# Allegro board hvps.brd
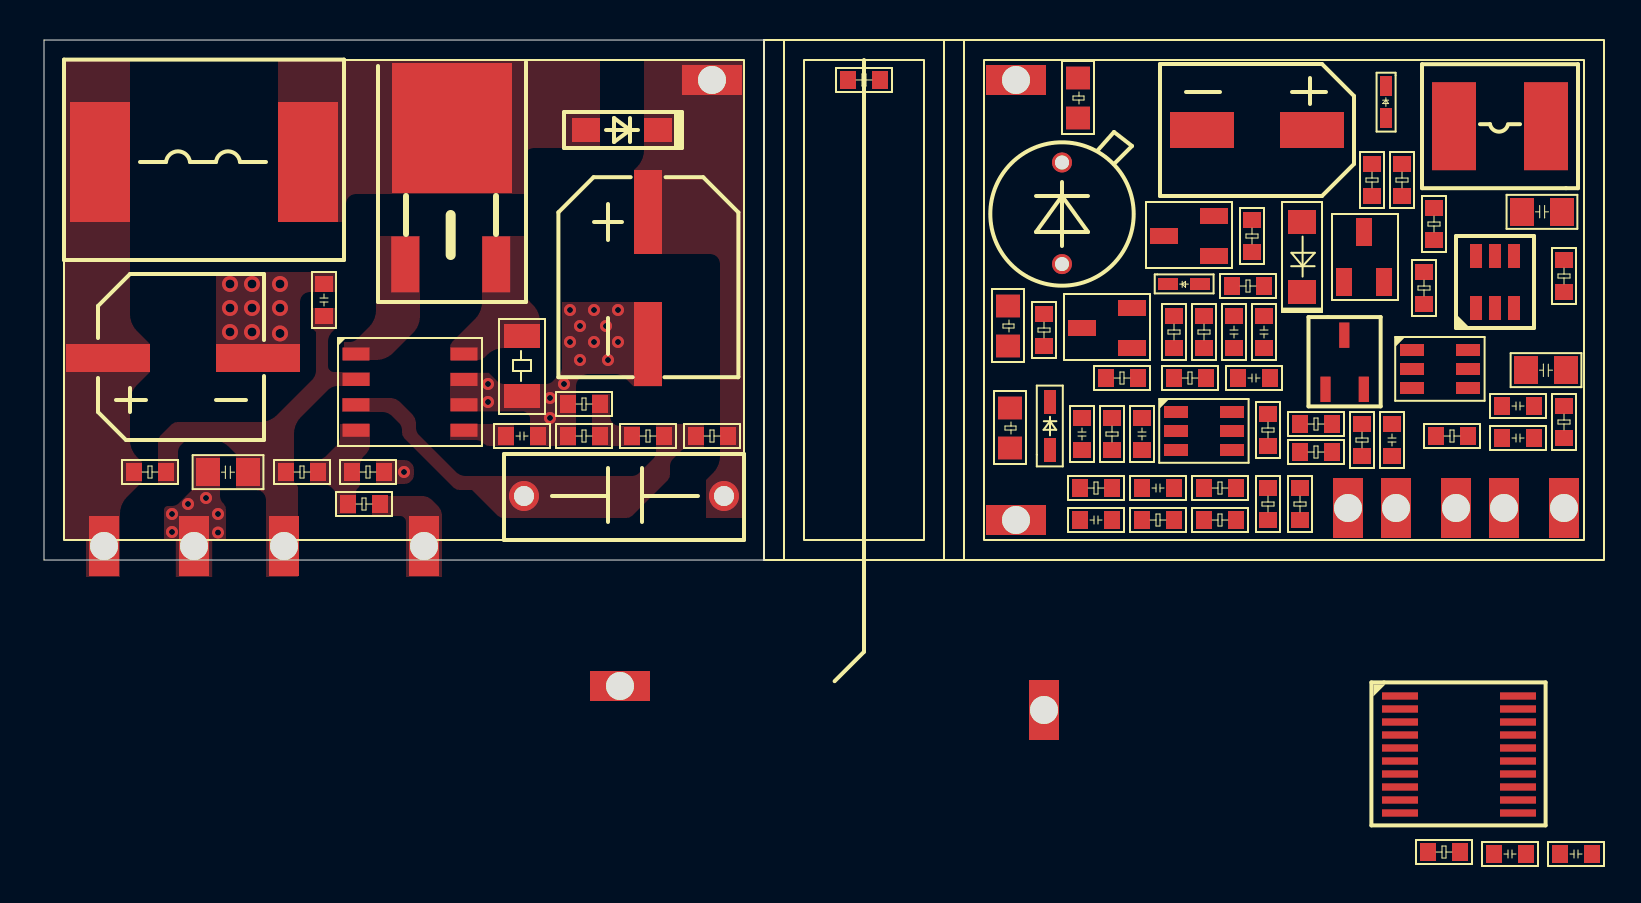
[diagram p0: board, top side]
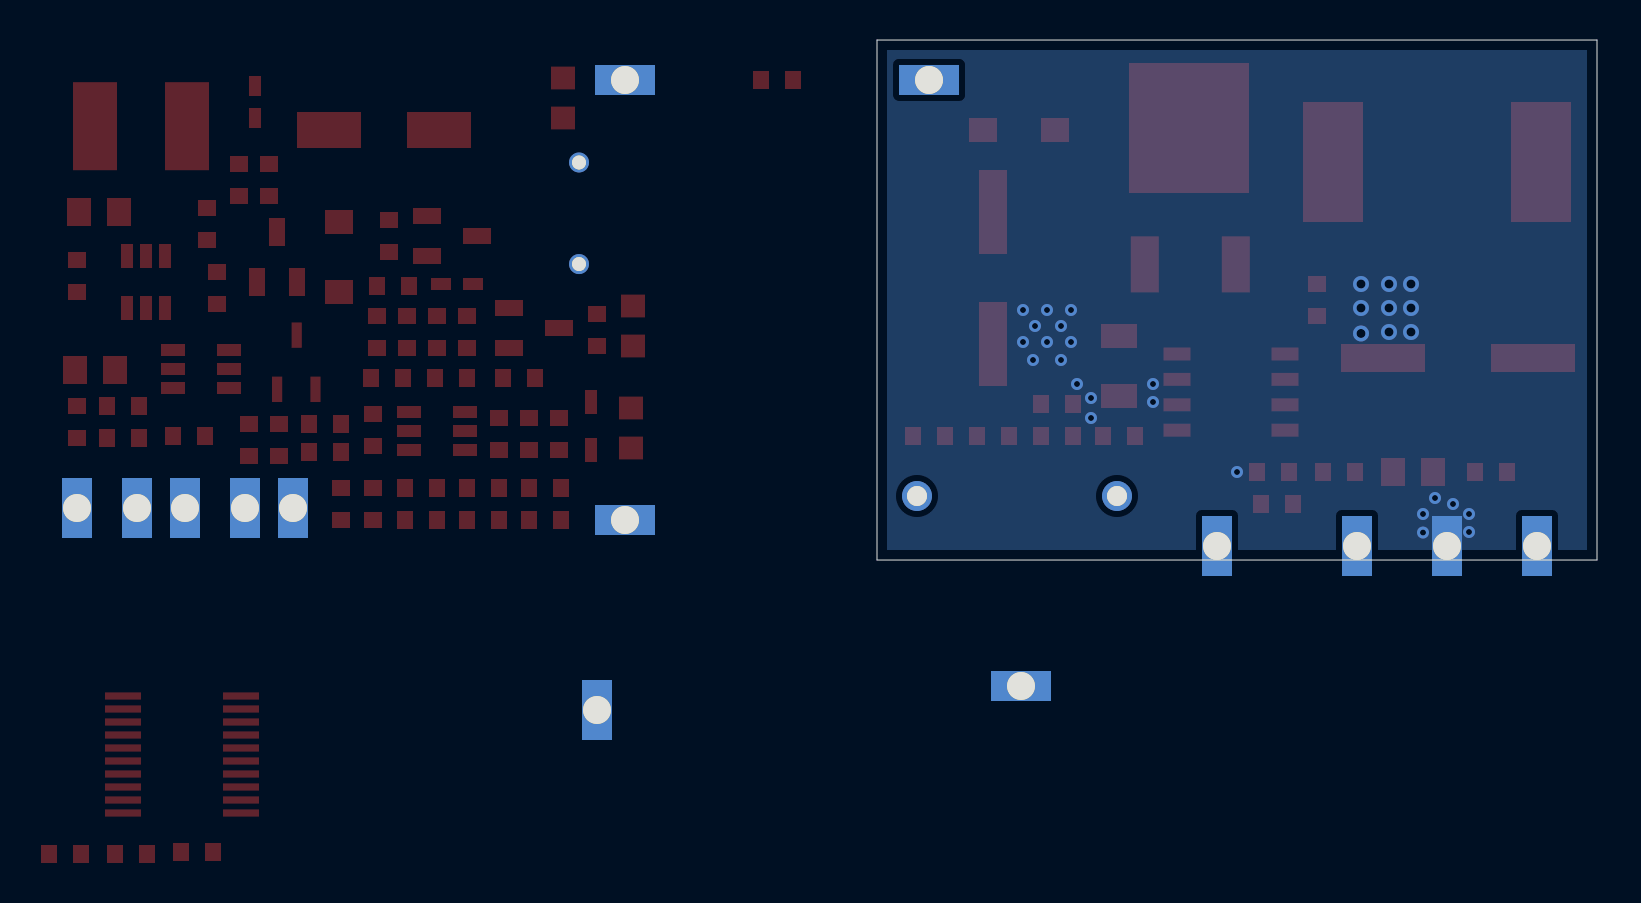
[diagram p1: board, bottom side, seen from below]

Outline 36 x 26 mm; copper layers: TOP, BOTTOM. Coordinates in mm from the lower left corner of the outline.
Outline path: 0,26 0,0 36,0 36,26 0,26

## Design rules (mm)
constraint set DEFAULT: min track width 0.254

## Placement (name value [footprint] x y rotation side)
C1  4.7uF/400V  [CAP-SMD-D8D0-L10D3-B8D3]  30.2 17.4 270 top
C2  0.1uF/35V  [C0603]  14 12.2 90 top
C3  220uF/35V  [CAP-SMD-D8D0-L8D3-W8D3-P7D5]  3.2 10.1 0 top
C4  10uF/35V  [C0805]  10.2 4.4 180 top
C5  0.1uF/35V  [C0603]  23.1 6.2 0 top
C6  0.1uF/400V  [CAP-THR-L11D4-W3D8-P10D0-D0D8]  34 3.2 180 top
C15  100uF/35V  [CAP-SMD-L6D6-W6D6-P5D5-MM]  63.4 21.5 180 top
C30  0.1uF/16V  [C0603]  51.9 5.5 90 top
C34  10uF/16V  [C0603]  72.9 6.1 0 top
C35  0.1uF/16V  [C0603]  72.9 7.7 0 top
C36  0.1uF/16V  [C0603]  67.4 5.2 90 top
C37  10uF/35V  [C0805]  76.1 9.5 180 top
C38  10uF/35V  [C0805]  73.9 17.4 0 top
C39  0.1uF/16V  [C0603]  75.8 -14.7 0 top
C40  0.1uF/16V  [C0603]  72.5 -14.7 0 top
C41  10uF/16V  [C0603]  61 10.6 90 top
C42  0.1uF/16V  [C0603]  59.5 10.6 90 top
C43  0.1uF/16V  [C0603]  54.9 7.1 270 top
C44  0.1uF/16V  [C0603]  54.9 3.6 0 top
C45  0.1uF/16V  [C0603]  51.8 2 0 top
C46  0.1uF/16V  [C0603]  59.7 9.1 0 top
D1  E1G  [SOD-123FL]  30.7 21.5 180 top
D2  PTVSLC3D3V3B  [SOD323-L1D8-W1D3-P2D4-MM]  50.3 5.5 90 top
D4  SAPD  [SAPD-THR-2P]  50.9 17.3 90 top
D7  BAS521-7  [SOD-523-L1D2-W0D8-P1D6-MM]  67.1 23.7 270 top
D11  MMSZ12T1G  [SOD-123-L2D8-W1D8-P3D5-MM]  62.9 13.4 90 top
D12  BAS521-7  [SOD-523-L1D2-W0D8-P1D6-MM]  56.2 13.8 0 top
L1  100uH/2A  [IND-SMD-L11D5-W10D0-P10D4]  2.8 19.9 0 top
L4  47uH/1A  [IND-SMD-L5D0-W5D0-P4D6-MM]  75.1 21.69 180 top
NOREF  -  []  28.8 -6.3 90 top
NOREF#2  -  []  0 13 0 top
NOREF#3  -  []  28.5 15.7 0 top
NOREF#4  -  []  3 0.7 0 top
NOREF#5  -  []  23.9 7.3 90 top
NOREF#6  -  []  30.2 10.8 90 top
NOREF#7  -  []  3.2 10.1 0 top
NOREF#8  -  []  18 0 90 top
NOREF#9  -  []  28.8 -6.3 90 top
NOREF#10  -  []  23.9 8.2 90 top
NOREF#11  -  []  2.7 8.25 0 top
NOREF#12  -  []  7.5 0.7 0 top
NOREF#13  -  []  12 0.7 0 top
NOREF#14  -  []  18.06 14.78 0 top
NOREF#15  -  []  18.06 14.78 0 top
NOREF#16  -  []  25.05 9.57 90 top
NOREF#17  -  []  33.6 12.9 90 top
NOREF#18  -  []  8.3 6 90 top
NOREF#19  -  []  27.1 21.5 0 top
Q1  AOD458  [TO-252-2-DPAK]  20.4 21.6 90 top
Q3  FH3400C  [SOT-23-3-L2D9-W1D3-P1D9-MM]  54.4 12.6 0 top
Q5  FH3400C  [SOT-23-3-L2D9-W1D3-P1D9-MM]  67 13.9 270 top
Q9  AO3401A  [SOT-23-3-L2D9-W1D3-P1D9-MM]  58.5 17.2 0 top
R1  50mR  [R1206]  23.9 11.2 270 top
R2  DNP  [R0603]  27.8 7.8 180 top
R3  10K  [R0603]  27.8 6.2 180 top
R4  0  [R0603]  31 6.2 180 top
R5  1.5M  [R0603]  34.2 6.2 180 top
R6  DNP  [R0603]  12.1 4.4 0 top
R7  0  [R0603]  17 4.4 180 top
R8  DNP  [R0603]  4.5 4.4 0 top
R9  DNP  [R0603]  16.8 2.8 180 top
R10  682  [R0603]  64.4 5.4 180 top
R11  332K  [R0805]  48.2 10.7 90 top
R12  0  [R0603]  50 10.7 90 top
R16  10K  [R0603]  69.6 6.2 0 top
R18  1M  [R0603]  61 13.7 180 top
R22  1K  [R0603]  60.4 17 270 top
R26  1K  [R0603]  69.5 16 90 top
R28  100  [R0603]  69 12.8 90 top
R33  182K  [R0603]  66.4 19.8 270 top
R35  10K  [R0603]  67.9 18.2 90 top
R36  0  [R0603]  76 6.1 90 top
R40  10K  [R0603]  76 13.4 90 top
R41  100K  [R0805]  48.3 5.6 90 top
R42  100  [R0603]  58 12.2 270 top
R43  1K  [R0603]  56.5 10.6 90 top
R56  100K  [R0603]  53.4 5.5 90 top
R57  4.99K  [R0603]  62.8 6.8 0 top
R60  499  [R0603]  61.2 2 90 top
R61  0  [R0603]  56.5 9.1 0 top
R62  10K  [R0603]  65.9 5.2 90 top
R63  1K  [R0603]  62.8 2 90 top
R64  0  [R0603]  69.2 -14.6 0 top
R65  4.99K  [R0603]  58 2 0 top
R66  4.99K  [R0603]  56.5 2 180 top
R67  100K  [R0603]  51.8 3.6 0 top
R68  4.99K  [R0603]  61.2 7.3 270 top
R69  100K  [R0603]  58 3.6 0 top
R70  100K  [R0603]  53.1 9.1 0 top
R71  0  [R0805]  51.7 22.1 90 top
R72  0  [R0603]  40.2 24 0 top
TP1  T POINT F  [STAMP_HOLE_1D5X3D0_1D4]  28.8 -6.3 270 top
TP2  T POINT F  [STAMP_HOLE_1D5X3D0_1D4]  33.4 24 270 top
TP3  T POINT F  [STAMP_HOLE_1D5X3D0_1D4]  3 0.7 180 top
TP4  T POINT F  [STAMP_HOLE_1D5X3D0_1D4]  7.5 0.7 180 top
TP5  T POINT F  [STAMP_HOLE_1D5X3D0_1D4]  12 0.7 180 top
TP6  T POINT F  [STAMP_HOLE_1D5X3D0_1D4]  19 0.7 180 top
TP16  QUENCH  [STAMP_HOLE_1D5X3D0_1D4]  70.6 2.6 180 top
TP25  RESET  [STAMP_HOLE_1D5X3D0_1D4]  65.2 2.6 180 top
TP32  T POINT F  [STAMP_HOLE_1D5X3D0_1D4]  73 2.6 180 top
TP33  T POINT F  [STAMP_HOLE_1D5X3D0_1D4]  76 2.6 180 top
TP34  T POINT F  [STAMP_HOLE_1D5X3D0_1D4]  50 -7.5 0 top
TP36  T POINT F  [STAMP_HOLE_1D5X3D0_1D4]  48.6 24 90 top
TP37  T POINT F  [STAMP_HOLE_1D5X3D0_1D4]  48.6 2 90 top
TP38  PULSE  [STAMP_HOLE_1D5X3D0_1D4]  67.6 2.6 180 top
U1  MAX1771ESA+  [SO-8]  21 10.3 270 top
U2  TLV3501AIDBVR  [SOT-23-6-L2D9-W1D6-PD0D95-CD2D8-MM]  68.4 10.5 0 top
U5  MAX5026EUT-T  [SOT23-6]  72.5 13.9 0 top
U8  TL431  [SOT-23-3-TL431]  63.6 8.1 0 top
U9  TXS0108EPW  [TSSOP-20-L6D5-W4D4-PD0D65-CD6D5-MM]  67.8 -6.8 0 top
U10  OPA357AIDBVR  [SOT-23-6-L2D9-W1D6-PD0D95-CD2D8-MM]  56.6 7.4 0 top

## Library data of the parts
C1 C3 C6 C15 = C
C2 C4 C5 C30 C34-C46 = CAP NP
D1 D4 D7 D12 = DIODE
D2 = DIODE SCHOTTKY
D11 = DIODE ZENER
L1 L4 = INDUCTOR
Q1 = IRF644PbF
Q3 Q5 = FH3400C
Q9 = BSP316P_0
R1-R12 R16 R18 R22 R26 R28 R33 R35 R36 R40-R43 R56 R57 R60-R72 = R
TP1-TP6 TP16 TP25 TP32-TP34 TP36-TP38 = T POINT F
U1 = MAX1771ESA+
U2 = TLV3501AIDBVR
U5 = MAX5026EUT-T
U8 = TL431/TI
U9 = TXS0108EPW
U10 = OPA357AIDBVR

## Footprints (pads in the part's own frame, mm; a bottom-side part is the same pattern mirrored in y, then rotated)
C0603
  rect 0.8x0.9 smd: 1(0,0) 2(1.6,0)
C0805
  rect 1.2x1.4 smd: 1(0,0) 2(2,0)
CAP-SMD-D8D0-L8D3-W8D3-P7D5
  rect 4.2x1.4 smd: 1(0,0) 2(7.5,0)
CAP-SMD-D8D0-L10D3-B8D3
  rect 4.2x1.4 smd: 1(0,0) 2(6.6,0)
CAP-SMD-L6D6-W6D6-P5D5-MM
  rect 3.2x1.8 smd: 1(0,0) 2(5.5,0)
CAP-THR-L11D4-W3D8-P10D0-D0D8
  round 1.5 hole 1: 1(0,0) 2(10,0)
IND-SMD-L5D0-W5D0-P4D6-MM
  rect 2.2x4.4 smd: 1(0,0) 2(4.6,0)
IND-SMD-L11D5-W10D0-P10D4
  rect 3x6 smd: 1(0,0) 2(10.4,0)
R0603
  rect 0.8x0.9 smd: 1(0,0) 2(1.6,0)
R0805
  rect 1.14x1.2 smd: 1(0,0) 2(2,0)
R1206
  rect 1.2x1.8 smd: 1(0,0) 2(3,0)
SAPD-THR-2P
  round 1 hole 0.7: 1(2.576,0) 2(-2.504,0)
SO-8
  rect 0.65x1.35 smd: 1(0,-5.4) 2(1.27,-5.4) 3(2.54,-5.4) 4(3.81,-5.4) 5(3.81,0) 6(2.54,0) 7(1.27,0) 8(0,0)
SOD323-L1D8-W1D3-P2D4-MM
  rect 1.2x0.6 smd: 1(0,0) 2(2.4,0)
SOD-123-L2D8-W1D8-P3D5-MM
  rect 1.2x1.4 smd: 1(0,0) 2(3.5,0)
SOD-123FL
  rect 1.4x1.2 smd: 1(0,0) 2(3.6,0)
SOD-523-L1D2-W0D8-P1D6-MM
  rect 1x0.6 smd: 1(0,0) 2(1.6,0)
SOT23-6
  rect 0.6x1.2 smd: 1(-0.9,-1.3) 2(0.05,-1.3) 3(1,-1.3) 4(1,1.3) 5(0.05,1.3) 6(-0.9,1.3)
SOT-23-3-L2D9-W1D3-P1D9-MM
  rect 1.4x0.8 smd: 1(0,-2) 2(0,0) 3(-2.5,-1)
SOT-23-3-TL431
  rect 0.51x1.27 smd: 1(0.476,0.434) 2(1.415,3.142) 3(2.391,0.434)
SOT-23-6-L2D9-W1D6-PD0D95-CD2D8-MM
  rect 1.2x0.6 smd: 1(0,0) 2(0,-0.95) 3(0,-1.9) 4(2.8,-1.9) 5(2.8,-0.95) 6(2.8,0)
STAMP_HOLE_1D5X3D0_1D4
  rect 1.5x3 hole 1.4: 1(0,0)
TO-252-2-DPAK
  rect 2.8x1.4 smd: 1(-6.82,2.34) 3(-6.82,-2.21)
  rect 6.5x6 smd: 2(0,0)
TSSOP-20-L6D5-W4D4-PD0D65-CD6D5-MM
  rect 1.8x0.36 smd: 1(0,0) 2(0,-0.65) 3(0,-1.3) 4(0,-1.95) 5(0,-2.6) 6(0,-3.25) 7(0,-3.9) 8(0,-4.55) 9(0,-5.2) 10(0,-5.85) 11(5.9,-5.85) 12(5.9,-5.2) 13(5.9,-4.55) 14(5.9,-3.9) 15(5.9,-3.25) 16(5.9,-2.6) 17(5.9,-1.95) 18(5.9,-1.3) 19(5.9,-0.65) 20(5.9,0)

## Nets
GND: C1.2 C2.2 C3.2 C4.2 C5.2 C39.1 C40.2 R1.2 R2.2 R3.2 R7.1 TP1.1(TP) TP4.1(TP) U1.6 U1.7 U9.11
GND_FIELD SIGNAL: C34.2 C35.2 C36.2 C41.2 C42.2 C44.2 C45.2 D2.1 Q3.2(S) Q5.2(S) R10.2 R16.2 R18.1 R26.2 R41.1 R43.2 R56.2 R66.1 R70.1 TP37.1(TP) U2.2(V-) U2.6 U8.2 U10.2(V-)
GND_QUENCH: C15.2 C37.2 C38.2 R35.2 TP34.1(TP) U5.1 U5.2
VDD5: C40.1 U9.19(VCCB)
VDD5X: C34.1 C35.1 C41.1 C42.1 R60.1 R65.2 U2.4 U10.5 U10.6
VDD33: C39.2 R64.1 U9.2
AUX_PWR_EN: R36.1 TP33.1(TP)
AUX_PWR_IN: C37.1 C38.1 L4.1 R40.1 TP32.1(TP) U5.5(VCC)
EN: R9.1 TP6.1(TP)
HV+: C1.1 C6.1 D1.1(K) R5.1 TP2.1(TP)
HVPS: R71.2 TP36.1(TP)
PHOTON_PULSE: U9.9
PULSE: R16.1 R62.1 TP38.1(TP) U2.5 U9.12
PWR_IC: C2.1 C4.1 R6.1 R8.2 TP5.1(TP) U1.2(V+)
PWR_IN: C3.1 L1.1 R8.1 TP3.1(TP)
QUENCH_VDWN: U9.1
QUENCH_VOLTAGE_DOWN: R28.1 TP16.1(TP) U9.20
RESET_DIS: U9.3
RESET_DISCHARGE: R42.1 TP25.1(TP) U9.18
VQUENCH: C15.1 D7.1(K) Q9.2(S) R22.1 R33.1
VREF: C36.1 R10.1 R57.2 R63.2
N00177: Q1.1 U1.1
N00181: Q1.3(S) R1.1 U1.8
N00224: D1.2 L1.2 Q1.2
N00671: C5.1 U1.5
N03183: R6.2 R7.2 R9.2 U1.4
N281531: C6.2 R4.1 R5.2 U1.3
N361468: R2.1 R3.1 R4.2
N365393: D7.2 L4.2 U5.6
N365573: R36.2 R40.2 U5.4
N365581: R33.2 R35.1 U5.3
N370992: D11.1(CATHODE) Q9.1 R22.2
N371048: D11.2 Q5.3
N371052: D4.2 D12.1(K) R11.2 R12.2
N371122: D12.2 Q9.3 R18.2
N371190: Q5.1 R26.1 R28.2
N371268: C30.2 D2.2(CATHODE) R11.1 R41.2
N371272: Q3.3 R12.1
N371414: Q3.1 R42.2 R43.1
N371666: C30.1 C43.2 R56.1
N372066: R57.1 R60.2 U8.1(REF) U8.3
N375383: R61.1 U2.1
N376175: R62.2 R63.1 U2.3
N378300: R64.2 U9.10
N379806: C44.1 R65.1 R66.2 R67.2
N380805: C43.1 R67.1 U10.3
N381019: R68.2 R69.2 U10.4
N381074: C46.2 R68.1 U10.1
N381200: C45.1 R69.1
N382559: C46.1 R61.2 R70.2
N382943: D4.1(K) R71.1

Pads without a net: R72 1 2; U9 4 5 6 7 8 13 14 15 16 17

## Via types
v1: diameter 0.6, hole 0.3, TOP to BOTTOM, 22 vias
v2: diameter 0.8, hole 0.45, TOP to BOTTOM, 9 vias

## Routing (per net, layer and track width the routed paths; a pad name or vN(x,y) marks a point on that pad's centre or on a via; arc(x,y) is an arc through that point)
GND:
  vias: v1(6.4,2.3) v1(6.4,1.4) v1(7.2,2.8) v1(8.1,3.1) v1(8.7,2.3) v1(8.7,1.37) v1(18,4.4) v1(22.2,8.8) v1(22.2,7.9) v1(25.3,8.1) v1(25.3,7.1) v1(26,8.8) v1(26.3,12.5) v1(26.3,10.9) v1(26.8,11.7) v1(26.8,10) v1(27.5,12.5) v1(27.5,10.9) v1(28.1,11.7) v1(28.2,10) v1(28.7,12.5) v1(28.7,10.9) v2(9.3,13.8) v2(9.3,12.6) v2(9.3,11.4) v2(10.4,13.8) v2(10.4,12.6) v2(10.4,11.4) v2(11.8,13.8) v2(11.8,12.6) v2(11.8,11.33)

## Copper pours and planes (outline as drawn; the poured copper is in the pictures)
GND on TOP: 25.9,12.9 30.9,12.9 30.9,8.68 29.48,8.68 29.07,9.09 28.83,9.24 28.56,9.3 27.2,9.3 27.02,9.26 26.86,9.16 26.74,9.04 26.64,8.88 26.6,8.7 26.6,5.7 24.3,5.7 24.3,7.08 24.28,7.17 24.23,7.25 24.11,7.36 24.03,7.42 23.94,7.43 20.3,7.43 20.3,9.36 22.25,9.36 22.66,8.94 22.82,8.84 23,8.8 25.1,8.8 25.28,8.84 25.44,8.94 25.76,9.26 25.86,9.42 25.9,9.6
GND on TOP: 8.6,14.4 14.6,14.4 14.6,13.4 13.3,13.4 12.95,13.25 12.8,12.9 12.8,9.4 8.6,9.4
GND on TOP: 7.5,5.2 8.8,5.2 8.8,3.2 8.84,3.02 8.94,2.86 8.96,2.84 9.06,2.68 9.1,2.5 9.1,1 8.41,1 8.41,-0.85 6.59,-0.85 6.59,1 6,1 6,2.5 6.06,2.64 6.2,2.7 6.4,2.7 6.58,2.74 6.74,2.84 7.36,3.46 7.46,3.62 7.5,3.8
GND on BOTTOM: 35.5,0.5 35.5,25.5 0.5,25.5 0.5,0.5
EN on TOP: 16.4,3.2 18.9,3.2 19.18,3.14 19.41,2.99 19.69,2.71 19.84,2.48 19.9,2.2 19.9,-0.85 18.1,-0.85 18.1,1.9 18.01,2.11 17.8,2.2 16.4,2.2
HV+ on TOP: 30,25 35,25 35,2.1 33.1,2.1 33.1,4 33.45,4.35 33.71,4.74 33.8,5.2 33.8,14.8 33.65,15.15 33.3,15.3 29.5,15.3 29.5,19.5 29.65,19.65 29.91,20.04 30,20.5
PWR_IC on TOP: 13.4,12.6 14.6,12.6 14.6,11.6 14.41,11.41 14.26,11.18 14.2,10.9 14.2,9.7 14.29,9.49 14.5,9.4 16.3,9.4 16.3,8.7 14.7,8.7 14.42,8.64 14.19,8.49 12.85,7.15 12.59,6.76 12.5,6.3 12.5,3.9 12.63,3.77 12.68,3.69 12.7,3.6 12.7,-0.85 11.1,-0.85 11.1,3 10.95,3.35 10.6,3.5 9.6,3.5 9.6,5.3 9.25,5.65 8.86,5.91 8.4,6 7.3,6 7.12,5.96 6.96,5.86 6.84,5.74 6.74,5.58 6.7,5.4 6.7,3.8 5.7,3.8 5.7,5.9 5.74,6.08 5.84,6.24 6.36,6.76 6.52,6.86 6.7,6.9 10.8,6.9 11.26,6.99 11.65,7.25 13.39,8.99 13.54,9.22 13.6,9.5 13.6,11.4 13.4,11.6
PWR_IN on TOP: 1,25 4.3,25 4.3,12.3 4.39,11.84 4.65,11.45 5.3,10.8 5.3,9.4 4.65,8.75 4.39,8.36 4.3,7.9 4.3,6 4.39,5.54 4.65,5.15 4.9,4.9 4.9,3.9 4.15,3.15 3.89,2.76 3.8,2.3 3.8,-0.85 2.1,-0.85 2.1,1 1,1
N00177 on TOP: 16.6,16.2 18.8,16.2 18.8,12.2 18.71,11.74 18.45,11.35 17.45,10.35 17.06,10.09 16.6,10 15,10 15,10.9 15.3,10.9 15.48,10.94 15.64,11.04 16.25,11.65 16.51,12.04 16.6,12.5
N00181 on TOP: 21.9,16.2 24,16.2 24,13.7 24.09,13.24 24.35,12.85 24.45,12.75 24.71,12.36 24.8,11.9 24.8,10.6 23,10.6 22.54,10.51 22.15,10.25 22.04,10.14 21.88,10.04 21.7,10 20.3,10 20.3,10.6 20.34,10.78 20.44,10.94 21.55,12.05 21.81,12.44 21.9,12.9
N00224 on TOP: 11.7,25 27.8,25 27.8,20.6 24.5,20.6 24.15,20.45 24,20.1 24,18.3 15.6,18.3 15.25,18.15 15.1,17.8 15.1,16.9 11.7,16.9
N00671 on TOP: 20.3,6.8 20.3,6 21.6,6 21.78,5.96 21.94,5.86 21.96,5.84 22.12,5.74 22.3,5.7 23.5,5.7 23.5,6.8
N03183 on TOP: 14.8,6.8 16.3,6.8 16.3,5.8 16.24,5.52 16.09,5.29 16.01,5.21 15.86,4.98 15.8,4.7 15.8,3.8 15.78,3.71 15.73,3.63 15.67,3.57 15.62,3.49 15.6,3.4 15.6,2.3 14.6,2.3 14.6,3.2 14.56,3.38 14.46,3.54 14.41,3.59 14.18,3.74 13.9,3.8 13.3,3.8 13.3,5 13.6,5 13.88,5.06 14.11,5.21 14.59,5.69 14.74,5.92 14.8,6.2
N281531 on TOP: 14.9,8.1 17.3,8.1 17.58,8.04 17.81,7.89 18.39,7.31 18.54,7.08 18.6,6.8 18.6,6.6 18.64,6.42 18.74,6.26 20.59,4.41 20.82,4.26 21.1,4.2 29.4,4.2 29.58,4.24 29.74,4.34 30.46,5.06 30.56,5.22 30.6,5.4 30.6,6.8 33,6.8 33,5.6 32.2,5.6 32.02,5.56 31.86,5.46 31.44,5.04 31.34,4.88 31.3,4.7 31.3,4.3 31.26,4.12 31.16,3.96 29.44,2.24 29.28,2.14 29.1,2.1 23,2.1 22.82,2.14 22.66,2.24 21.4,3.5 20.8,3.5 20.62,3.54 20.46,3.64 18.04,6.06 17.94,6.22 17.9,6.4 17.9,6.5 17.86,6.68 17.76,6.84 17.41,7.19 17.18,7.34 16.9,7.4 14.9,7.4
N361468 on TOP: 27.4,8.3 28.3,8.3 28.3,7.2 28.45,6.85 28.8,6.7 29.8,6.7 29.8,5.7 27.4,5.7
GND on TOP: 16.6,5 18,5 18.35,4.85 18.5,4.5 18.5,4.3 18.35,3.95 18,3.8 16.6,3.8
